# Altium PCB PCB1.PcbDoc
Units mil, origin at the board's own origin, x right, y up, seen from the top; angles counter-clockwise.
Board outline 1259.84 x 1850.39 mil, 2 copper layers (Top Layer, Bottom Layer); 2 components, 2 nets, 6 pads, 0 vias.
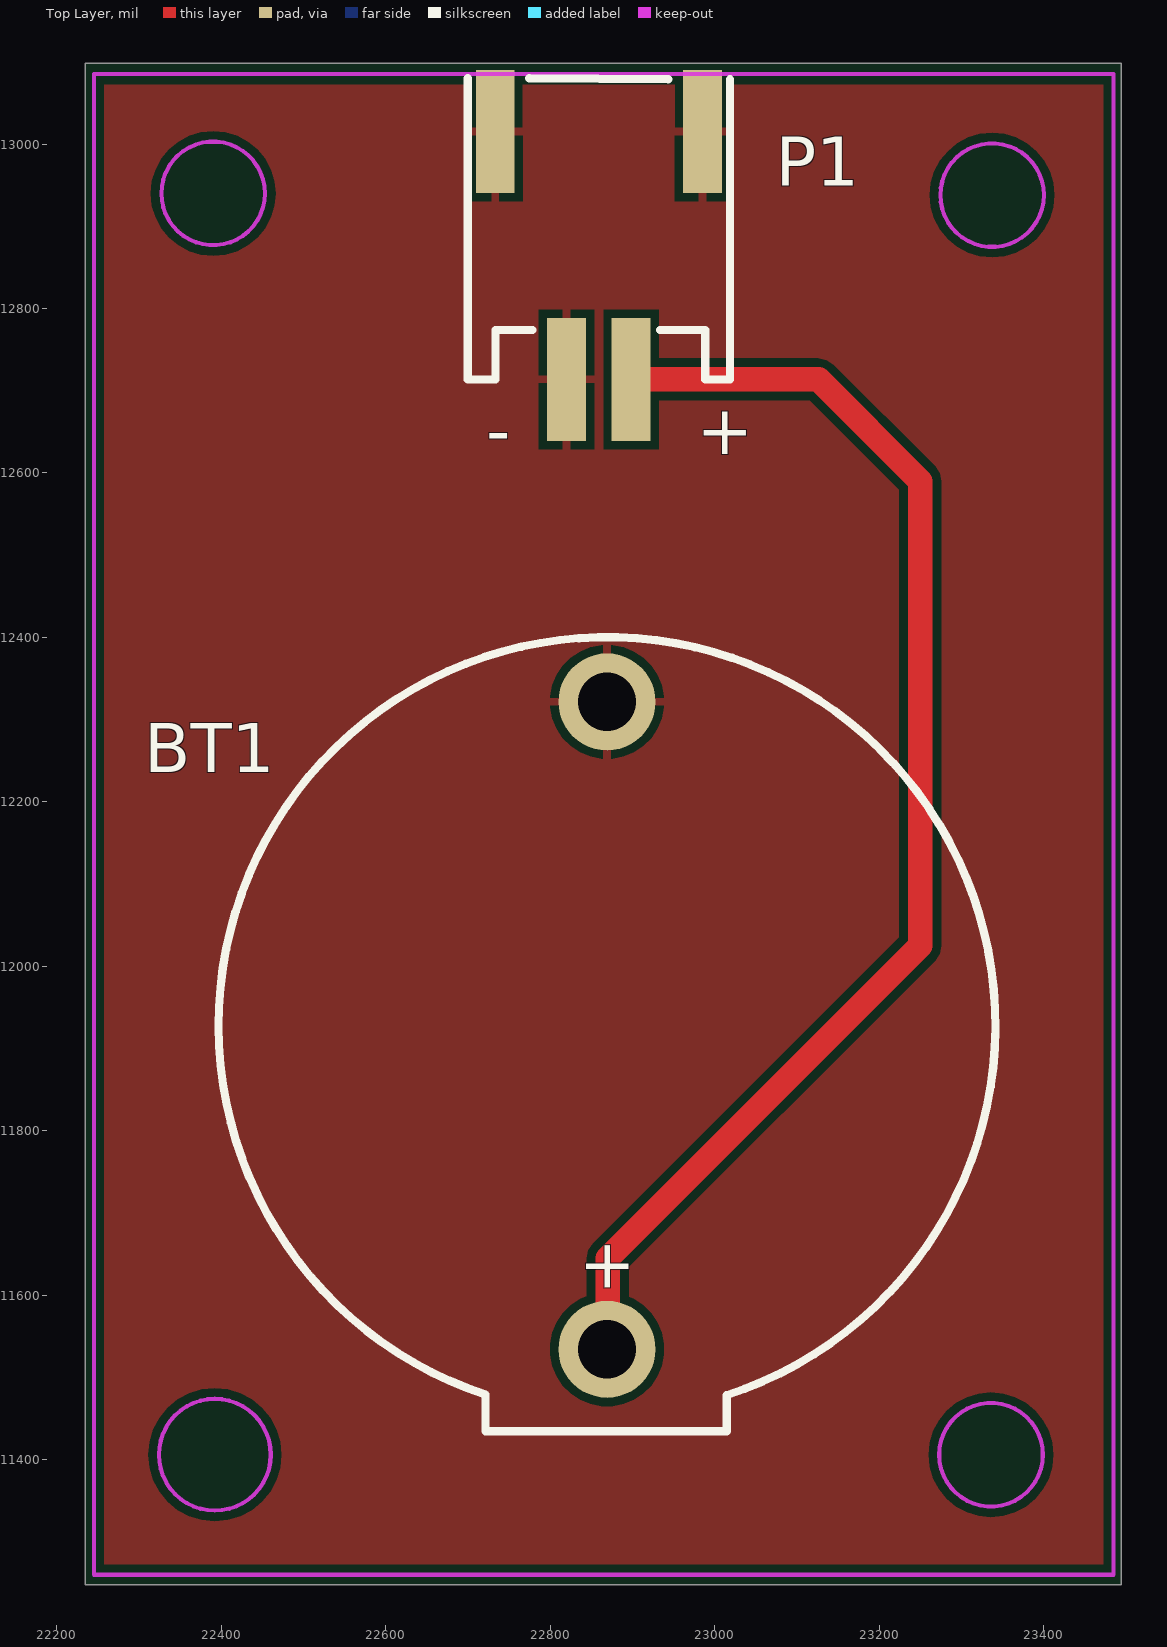
[diagram p0: Top Layer view]
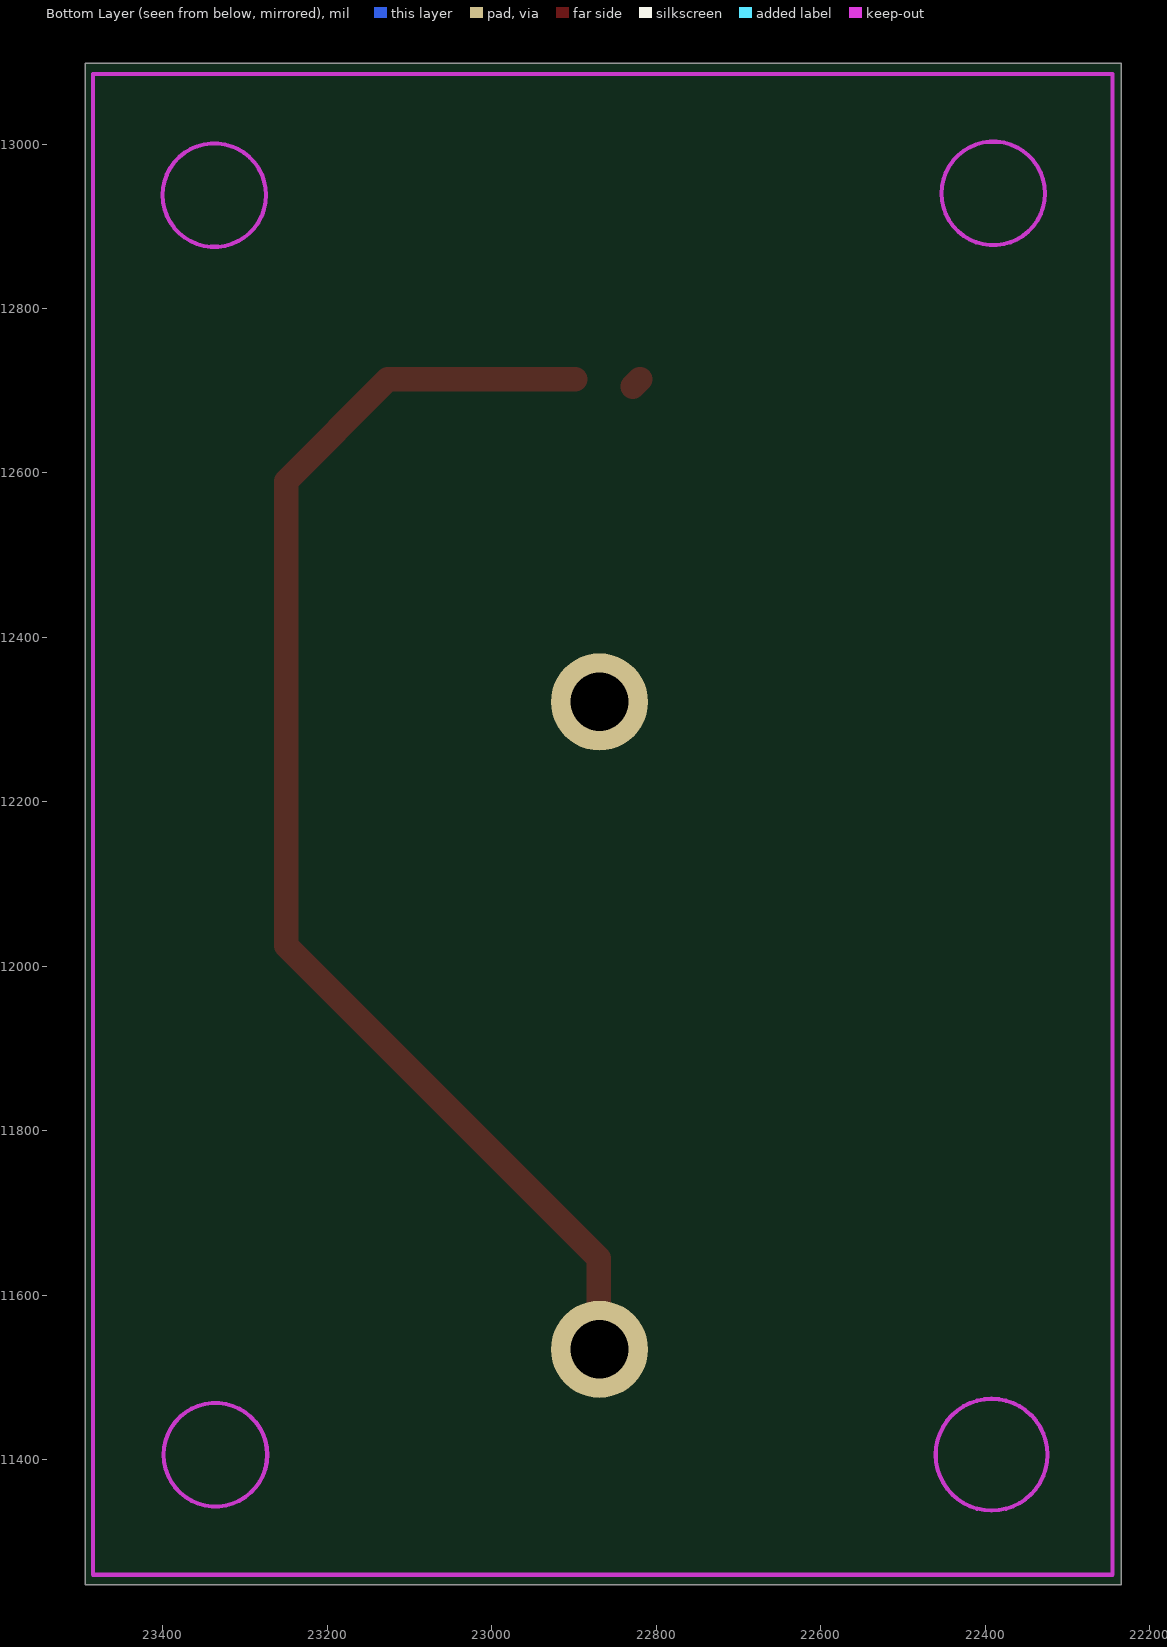
[diagram p1: Bottom Layer view, seen from below]

## Layer stack, top to bottom
Top Solder: solder mask 0.4, Solder Resist, Dk 3.5
Top Layer: signal copper 1.4
Dielectric 1: dielectric 12.6, FR-4, Dk 4.8
Bottom Layer: signal copper 1.4
Bottom Solder: solder mask 0.4, Solder Resist, Dk 3.5

## Board outline
22234.46,11247.88 22234.46,13098.27 23494.3,13098.27 23494.3,11247.88

## Design rules (kind name [scope] priority, off if disabled: settings)
Clearance [All] p1: gap=10 ignorepadtopadclearanceinfootprint=FALSE except(0: Arc-Hole Track-Hole SMDPad-Hole THPad-Hole Via-Hole Fill-Hole Poly-Hole Region-Hole Text-Hole)
PolygonConnect [All] p1: connectstyle=Relief reliefconductorwidth=10 reliefentries=4 polygonreliefangle="90 Angle" airgapwidth=10
RoutingVias [All] p1: holewidth=28 width=50 viastyle="Through Hole" minholewidth=28 minwidth=50 maxholewidth=28 maxwidth=50
SolderMaskExpansion [All] p1: expansion=4 istentingtop=FALSE
Width [All] p1: maxlimit=200 minlimit=10 preferedwidth=10
30 further rules are at their usual default settings.

## Components (designator, comment, footprint, x,y, rotation, side; value= is the part's Value field where it differs from the comment)
BT1 "BS-02-A1AJ010" BS-02-A1AJ010 22869,11534.2 r270 top
P1 "Header 2" 2x2.0mm_smt 22898.39,12713.82 r180 top

## Footprints (in the part's own frame and the unit in brackets; to place one, negate y for a bottom-side part, rotate by r counter-clockwise, add the part's x,y. Pads: shape width x height; smd on the part's side, far side on the other; paste and mask are expansions set on the pad)
2x2.0mm_smt [mm]
  rect 1.2x3.8 smd: 1(0,0) 2(2,0) 3(-2.2,-7.65) 4(4.2,-7.65)
  silkscreen extent -3.05,-9.3 5.05,0
BS-02-A1AJ010 [mm]
  round 3 hole 1.8: 1(0,0) 2(-20,0)
  silkscreen extent -22,-12 2.53,12

## Part data
BT1: library part Battery, "Multicell Battery", LatestRevisionDate=17-Jul-2002, LatestRevisionNote="Re-released for DXP Platform.", PackageReference=BAT-2, Published=24-Mar-1999, Publisher="Altium Limited"
P1: "Header, 2-Pin", LatestRevisionDate=17-Jul-2002, LatestRevisionNote="Re-released for DXP Platform.", Publisher="Altium Limited"

## Nets (pads, with @x,y where several pads share a name; then routed paths per layer and width w, separated by ;. In a path a pad name is that pad's centre, name@x,y a point inside that pad or via, vN(x,y) a via of type N, cw(c..) or ccw(c..) an arc to the next point about the centre after c; other vN are vias at no path point)
GND: BT1.2 P1.2 P1.3 P1.4 | length 12.2
  Top Layer w30: P1.2 P1.2@22828.27,12705.2
NetBT1_1: BT1.1 P1.1 | length 1616.1
  Top Layer w30: BT1.1@22870,11534.2 22870,11645 23250,12025 23250,12590 23126.18,12713.82 P1.1

## Polygon pours and split planes (outlines as drawn)
GND on Top Layer "GND_L01_P000" (solid, remove dead copper, pour order 0): 21942,13226 21953,13215 23899,13215 23899,11211 23853,11165 22141,11165 22141,11690 21953,11878 22099,12024 22099,13215

## Keep-outs
Keep-Out Layer:
  circle w5: c23336,11406 r62.99
  circle w5: c22392,11406 r68
  circle w5: c22390,12940 r62.99
  circle w5: c23337.36,12937.91 r62.99
  lines w5: 22245,11260 23485,11260 23485,13085 22245,13085 22245,11260

## Silkscreen, mask and mechanical layers (free items; w line width, h text height)
Top Overlay:
  text "+" at 22978,12623 h60
  text "-" at 22722,12622.01 h60
Mechanical 1:
  circle w5: c23336.82,12940.79 r62.99
  circle w5: c22391.94,12940.79 r62.99
  circle w5: c22391.94,11405.36 r62.99
  circle w5: c23336.82,11405.36 r62.99
  lines w5: 22234.46,11247.88 22234.46,13098.27 23494.3,13098.27 23494.3,11247.88 22234.46,11247.88
Mechanical 2:
  drawing of 7270 lines, arcs and shapes, not listed

## Text inside footprints (layer, text, board x,y; h text height)
BT1: Top Overlay "+" at 22844,11669.19 h60 r270